# Altium PCB SFCRS232.PcbDoc
Units mm, origin at the board's own origin, x right, y up, seen from the top; angles counter-clockwise.
Board outline 149.66 x 75.74 mm, 2 copper layers (Top Layer, Bottom Layer); 13 components, 16 nets, 53 pads, 4 vias.
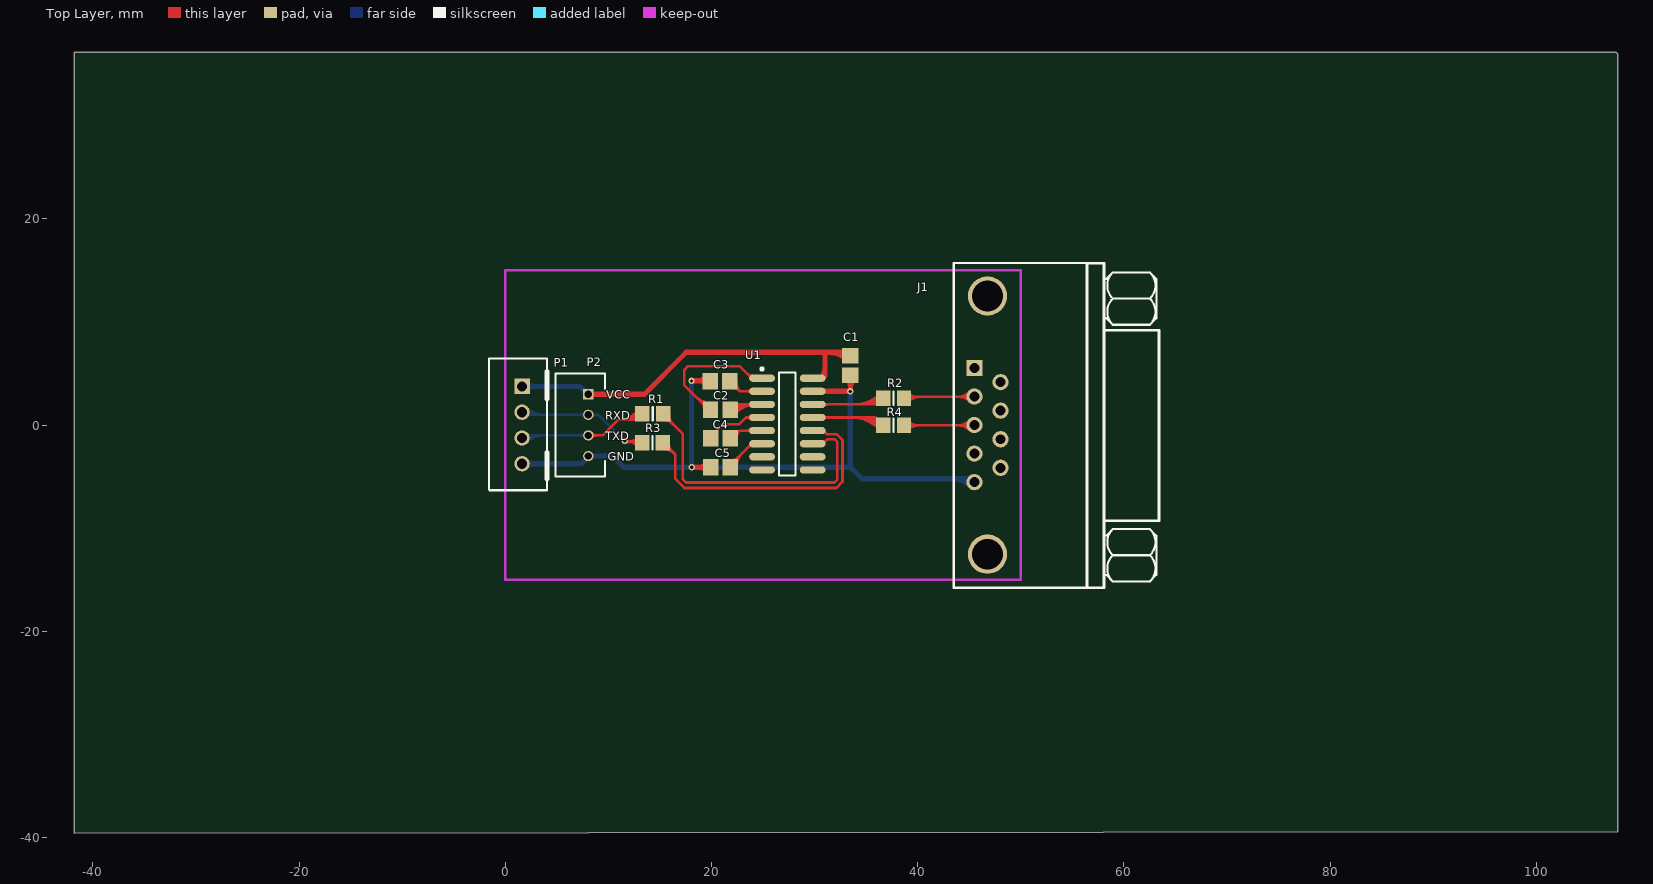
[diagram p0: Top Layer view]
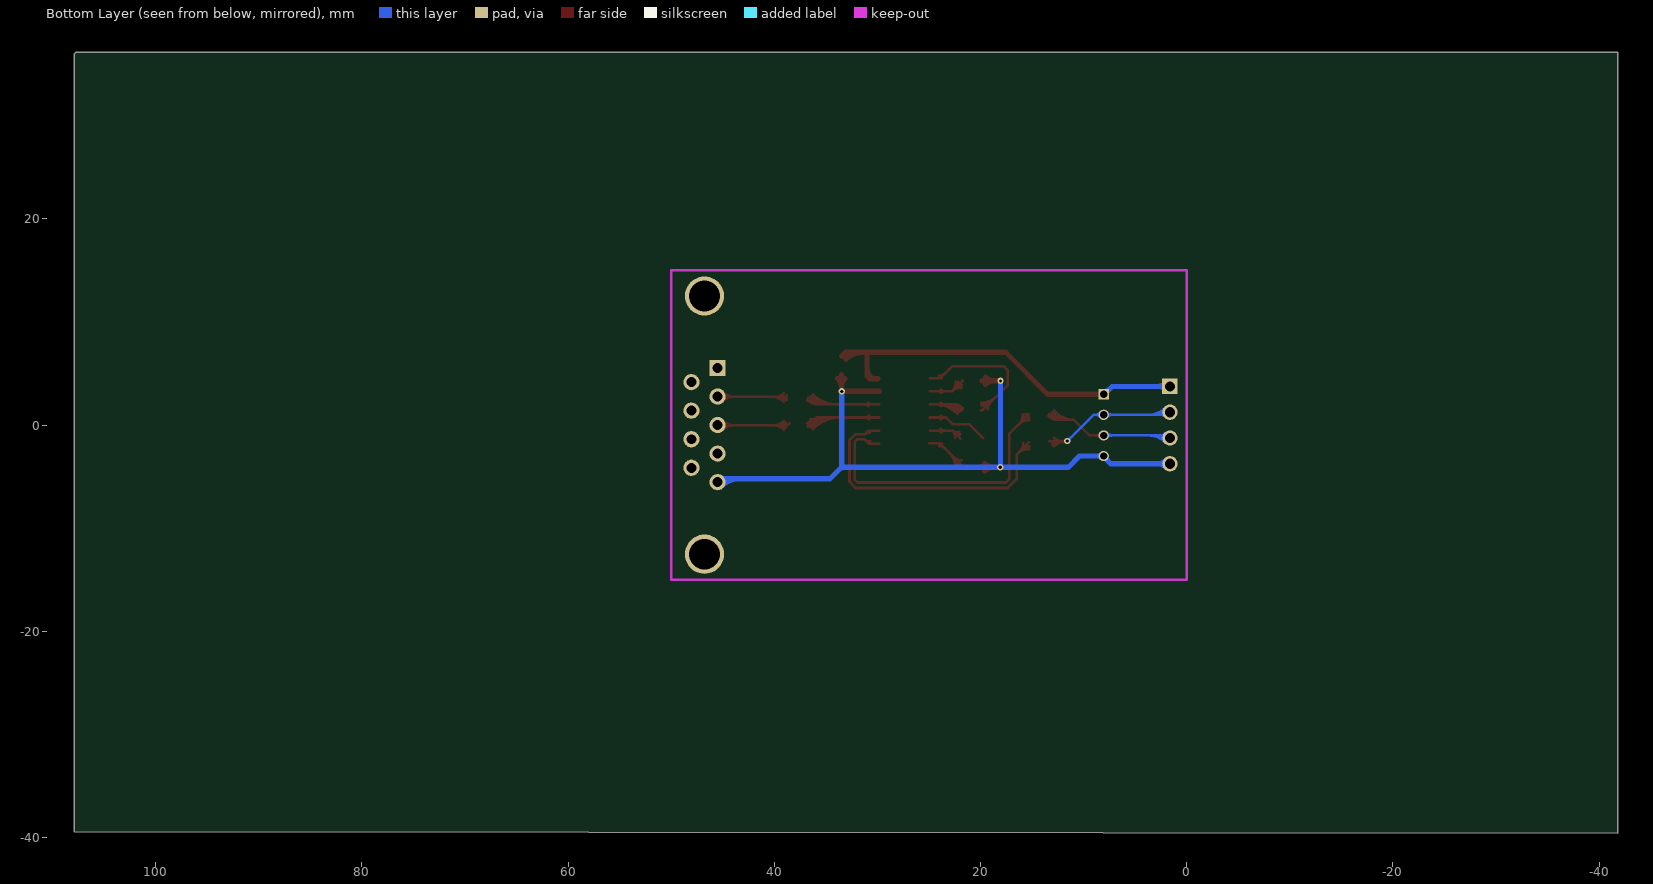
[diagram p1: Bottom Layer view, seen from below]

## Layer stack, top to bottom
Top Solder: solder mask 0.0102, Solder Resist, Dk 3.5
Top Layer: signal copper 0.0356
Dielectric1: dielectric 0.32, FR-4, Dk 4.8
Bottom Layer: signal copper 0.0356
Bottom Solder: solder mask 0.0102, Solder Resist, Dk 3.5

## Board outline
-41.785,-39.599 -41.785,36.144 107.719,36.144 107.77,36.093 107.871,35.992 107.871,-39.421

## Design rules (kind name [scope] priority, off if disabled: settings)
Clearance [All] p1: gap=0.245
HoleSize [All] p1: absolutevalues=TRUE maxlimit=5.08 minlimit=0.025 maxpercent=80.000 minpercent=20.000
PolygonConnect [All] p1: connectstyle=Relief reliefconductorwidth=0.254 reliefentries=4 polygonreliefangle="90 Angle" airgapwidth=0.254
RoutingVias [All] p1: holewidth=0.711 width=1.27 viastyle="Through Hole" minholewidth=0.711 minwidth=1.27 maxholewidth=0.711 maxwidth=1.27
SilkToSolderMaskClearance SilkscreenOverComponentPads [IsPad] p1: minsilkscreentomaskgap=0.254 clearancetoexposedcopper=TRUE
SolderMaskExpansion [All] p1: expansion=0.102
Width Width_PWR [InNet('VCC') or InNet('GND')] p1: maxlimit=0.508 minlimit=0.254 preferedwidth=0.508
Width [All] p2: maxlimit=0.254 minlimit=0.254 preferedwidth=0.254
27 further rules are at their usual default settings.

## Components (designator, comment, footprint, x,y, rotation, side; value= is the part's Value field where it differs from the comment)
C1 "0.1uF" CAPC2012M 33.452,5.791 r90 top
C2 "0.1uF" CAPC2012M 20.853,1.499 r180 top
C3 "0.1uF" CAPC2012M 20.828,4.267 r180 top
C4 "0.1uF" CAPC2012M 20.879,-1.295 r180 top
C5 "0.1uF" CAPC2012M 20.879,-4.089 r0 top
J1 "D Connector 9" DB9-M 46.765,0 r90 top
P1 "Header 4-2.5" HDR1X4-2.5 1.626,0 r270 top
P2 "Header 4-2.0" HDR1X4-2.0 8.052,0 r270 top
R1 "300R" RESC2012M 14.3,1.092 r0 top
R2 "300R" RESC2012M 37.668,2.616 r0 top
R3 "300R" RESC2012M 14.275,-1.702 r0 top
R4 "300R" RESC2012M 37.668,-0.025 r0 top
U1 "SP3232E" NSO16_M 27.356,0.102 r0 top

## Footprints (in the part's own frame and the unit in brackets; to place one, negate y for a bottom-side part, rotate by r counter-clockwise, add the part's x,y. Pads: shape width x height; smd on the part's side, far side on the other; paste and mask are expansions set on the pad)
CAPC2012M [mm] "Chip Capacitor, Body 2.0x1.3mm, IPC Low Density"
  rect 1.5x1.6 smd: 1(-0.95,0) 2(0.95,0)
  body extent -1.1,-0.72 1.1,0.72, height 1.1
DB9-M [mil] "DB9公座"
  rect 62x62 hole 38: 1(218,50)
  round 62 hole 38: 2(109,50) 3(0,50) 4(-109,50) 5(-218,50) 6(164,-50) 7(55,-50) 8(-54,-50) 9(-163,-50)
  round 150 hole 118.11: 10(493,0) 11(-493,0)
  silkscreen extent -622,-655 619,129, body extent -623,-375 617,125, height 394
HDR1X4-2.0 [mm] "Connector; Header; 4 Position, pitch 2mm"
  rect 1x1 hole 0.7: 1(-3,0)
  round 1 hole 0.7: 2(-1,0) 3(1,0) 4(3,0)
  silkscreen extent -5,-3.2 5,1.6
HDR1X4-2.5 [mm] "Connector; Header; 4 Position;Pitch 2.5mm"
  rect 1.5x1.5 hole 1: 1(-3.75,0)
  round 1.5 hole 1: 2(-1.25,0) 3(1.25,0) 4(3.75,0)
  silkscreen extent -6.45,-3.2 6.32,2.41
NSO16_M [mm] "SOIC, 16-Leads, Body 9.9x3.9mm, Pitch 1.27mm, IPC Low Density"
  oval 2.5x0.7 smd: 1(-2.45,4.445) 2(-2.45,3.175) 3(-2.45,1.905) 4(-2.45,0.635) 5(-2.45,-0.635) 6(-2.45,-1.905) 7(-2.45,-3.175) 8(-2.45,-4.445) 9(2.45,-4.445) 10(2.45,-3.175) 11(2.45,-1.905) 12(2.45,-0.635) 13(2.45,0.635) 14(2.45,1.905) 15(2.45,3.175) 16(2.45,4.445)
  silkscreen extent -2.57,-5 0.8,5.47, body extent -2,-5 2,5, height 1.75
RESC2012M [mm] "Chip Resistor, Body 2.0x1.3mm, IPC Low Density"
  rect 1.4x1.5 smd: 1(-1,0) 2(1,0)
  silkscreen extent 0,-0.65 0,0.65, body extent -1.07,-0.7 1.07,0.7, height 0.65

## Part data
C1 C2 C3 C4 C5: library part Cap, "Capacitor"
J1: "串口"
P1 P2: library part "Header 4", "Header, 4-Pin"
R1 R2 R3 R4: library part Res1, "Resistor"
U1: "+3.0V+5V Powered, Multi-Channel RS-232 Driver/Receiver"

## Via types
v1: diameter 0.6, hole 0.3, Top Layer to Bottom Layer, 4 vias

## Nets (pads, with @x,y where several pads share a name; then routed paths per layer and width w, separated by ;. In a path a pad name is that pad's centre, name@x,y a point inside that pad or via, vN(x,y) a via of type N, cw(c..) or ccw(c..) an arc to the next point about the centre after c; other vN are vias at no path point)
GND: C1.1 C3.2 C5.1 J1.5 P1.4 P2.4 U1.15 | length 81.4
  Top Layer w0.508: v1(18.059,4.293) C3.2@19.837,4.293 ; v1(18.085,-4.089) C5.1@20.066,-4.089 ; 18.621,4.293 ccw(c18.621,5.574) C3.2@19.527,4.668 ; 18.74,4.293 cw(c18.74,3.179) C3.2@19.527,3.966 ; C5.1@19.578,-4.44 ccw(c18.731,-5.287) 18.731,-4.089 ccw(c18.731,-2.892) C5.1@19.578,-3.739 ; U1.15 v1(33.452,3.277) 33.477,3.277 C1.1@33.477,4.902 ; C1.1@33.151,4.49 cw(c32.364,3.703) 33.477,3.703 ; 33.477,3.584 cw(c34.759,3.584) C1.1@33.853,4.49
  Bottom Layer w0.508: P1.4 7.375,-3.75 P2.4@8.077,-3.048 ; P1.4@1.976,-4.101 cw(c2.823,-4.947) 2.823,-3.75 cw(c2.823,-2.553) P1.4@1.976,-3.399 ; 7.58,-3.545 ccw(c7.035,-3) P2.4@7.806,-3 ; P2.4@8.026,-2.997 10.389,-2.997 11.481,-4.089 v1@18.059,-4.089 ; P2.4@8.226,-3.174 cw(c8.652,-3.601) 8.652,-2.997 ; P2.4@8.226,-2.826 ccw(c8.639,-2.413) 8.639,-2.997 ; v1(18.059,4.293) v1@18.059,-4.089 ; 33.452,-4.14 33.528,-4.14 34.595,-5.207 J1.5@45.034,-5.207 ; v1(33.452,3.277) 33.452,-4.115 ; 33.477,-4.14 33.452,-4.115 ; 43.41,-5.207 cw(c43.41,-7.622) J1.5@45.118,-5.914 ; 44.636,-5.207 cw(c44.636,-6.396) J1.5@45.477,-5.555 ; v1@18.059,-4.089 v1(18.085,-4.089) 33.426,-4.089 33.452,-4.115
MCU_RXD1: R3.2 U1.12 | length 31.7
  Top Layer w0.254: R3.2@15.275,-2.325 cw(c15.275,-3.99) 16.452,-2.813 ; R3.2@15.275,-2.071 cw(c15.275,-3.123) 16.019,-2.379 ; R3.2@15.291,-1.651 16.485,-2.845 16.485,-5.207 17.374,-6.096 32.1,-6.096 32.706,-5.49 32.706,-1.444 32.134,-0.873 31.2,-0.873 ; R3.2@15.848,-1.752 ccw(c16.949,-1.752) 16.17,-2.531 ; U1.12 30.861,-0.533 31.2,-0.873 ; U1.12@30.759,-0.75 cw(c30.871,-1.202) 31.2,-0.873
MCU_RXDA: P1.2 P2.2 R3.1 | length 25.4
  Top Layer w0.254: v1(11.582,-1.549) R3.1@13.335,-1.549 ; v1@11.644,-1.549 cw(c11.644,-3.282) R3.1@12.87,-2.057 ; v1@11.669,-1.699 cw(c11.905,-2.108) 12.027,-1.652 ; v1@11.705,-1.672 cw(c12,-1.967) 12,-1.549 cw(c12,-1.132) v1@11.705,-1.427 ; v1@11.732,-1.463 ccw(c12.047,-1.281) 11.953,-1.632 ; 12.139,-1.549 ccw(c12.139,-0.516) R3.1@12.87,-1.247 ; 12.257,-1.549 cw(c12.257,-2.669) R3.1@13.049,-1.877
  Bottom Layer w0.254: P1.2@1.651,1.27 1.921,1 9.033,1 v1@11.633,-1.6 ; P1.2@1.707,1.331 ccw(c2.507,2.131) 2.507,1 ; P1.2@1.887,1.511 ccw(c3.12,2.744) 3.12,1 ; P1.2@2.066,0.809 cw(c2.526,0.349) 2.526,1 ; P1.2@2.066,1.691 ccw(c3.733,3.358) 3.733,1 ; P2.2@7.788,0.736 ccw(c7.151,0.099) 7.151,1 ccw(c7.151,1.9) P2.2@7.788,1.264 ; P2.2@8.316,0.736 cw(c8.952,0.099) 8.952,1 cw(c8.952,1.9) P2.2@8.316,1.264 ; v1@11.409,-1.549 ccw(c10.992,-1.549) 11.287,-1.254 ccw(c11.582,-0.959) v1@11.582,-1.376
MCU_TXD1: R1.2 U1.11 | length 32.7
  Top Layer w0.254: R1.2@15.3,0.469 cw(c15.3,-0.951) 16.304,0.053 ; R1.2@15.3,0.723 cw(c15.3,-0.084) R1.2@15.871,0.487 ; R1.2@15.367,1.118 15.367,0.991 17.196,-0.838 17.196,-5.213 17.546,-5.563 31.928,-5.563 32.207,-5.283 32.207,-1.651 31.928,-1.372 31.267,-1.372 ; R1.2@15.619,1.042 ccw(c16.353,1.042) R1.2@15.834,0.524 ; R1.2@15.873,1.042 ccw(c17.22,1.042) 16.268,0.09 ; U1.11 30.836,-1.803 31.267,-1.372 ; U1.11@30.719,-1.581 ccw(c30.76,-0.864) 31.267,-1.372
MCU_TXDA: P1.3 P2.3 R1.1 | length 26.5
  Top Layer w0.254: P2.3 9.414,-1 10.922,0.508 ; P2.3@8.316,-1.264 cw(c8.952,-1.901) 8.952,-1 cw(c8.952,-0.1) P2.3@8.316,-0.736 ; 11.468,0.508 ccw(c11.468,2.584) R1.1@13.056,1.248 ; 12.013,0.508 ccw(c12.013,2.125) R1.1@13.25,1.084 ; 12.559,0.508 ccw(c12.559,1.666) R1.1@13.445,0.921 ; R1.1@12.862,1.411 cw(c10.922,3.042) 10.922,0.508 ; R1.1@13.335,1.092 12.751,0.508 10.922,0.508
  Bottom Layer w0.254: P1.3@1.676,-1.27 1.946,-1 P2.3 ; P1.3@1.707,-1.331 cw(c2.507,-2.131) 2.507,-1 ; P1.3@1.887,-1.511 cw(c3.12,-2.744) 3.12,-1 ; P1.3@2.066,-1.691 cw(c3.733,-3.358) 3.733,-1 ; P1.3@2.066,-0.809 ccw(c2.526,-0.35) 2.526,-1 ; P2.3@7.788,-1.264 ccw(c7.151,-1.901) 7.151,-1 ccw(c7.151,-0.1) P2.3@7.788,-0.736
NetC2_1: C2.1 U1.3 | length 11
  Top Layer w0.254: C2.1@21.705,1.647 cw(c22.574,0.778) 22.574,2.007 ; C2.1@21.768,1.422 22.352,2.007 U1.3 ; C2.1@21.885,1.467 cw(c23.187,0.165) 23.187,2.007 ; C2.1@22.064,1.288 cw(c23.8,-0.448) U1.3@23.8,2.007 ; C2.1@22.244,1.108 cw(c24.413,-1.061) U1.3@24.413,2.007 ; U1.3@23.848,1.849 ccw(c23.467,1.468) 23.467,2.007 ccw(c23.467,2.545) U1.3@23.848,2.164
NetC2_2: C2.2 U1.1 | length 17.6
  Top Layer w0.254: 18.468,2.766 ccw(c19.903,4.201) C2.2@19.903,2.172 ; 18.902,2.332 ccw(c19.903,3.334) C2.2@19.903,1.918 ; 18.994,2.241 cw(c18.302,1.549) C2.2@19.28,1.549 ; C2.2@19.99,1.448 19.787,1.448 17.374,3.861 17.374,5.359 17.729,5.715 22.733,5.715 23.901,4.547 U1.1 ; 23.447,5.001 ccw(c24.006,5.56) U1.1@24.006,4.77 ; 23.699,4.749 cw(c23.496,4.547) U1.1@23.783,4.547
NetC3_1: C3.1 U1.2 | length 7.7
  Top Layer w0.254: C3.1@21.717,4.343 22.784,3.277 ; C3.1@21.822,3.851 cw(c21.908,3.139) C3.1@22.414,3.646 ; C3.1@21.852,3.599 cw(c21.987,2.48) 22.784,3.277 ; C3.1@22.147,4.214 ccw(c22.858,4.208) C3.1@22.355,3.705 ; C3.1@22.401,4.212 ccw(c23.708,4.201) 22.784,3.277 ; U1.2@23.848,3.119 ccw(c23.467,2.738) 23.467,3.277 ccw(c23.467,3.815) U1.2@23.848,3.434 ; U1.2 22.784,3.277
NetC4_1: C4.1 U1.5 | length 6.2
  Top Layer w0.254: C4.1@21.946,-1.321 22.733,-0.533 ; C4.1@21.968,-0.904 ccw(c22.14,-0.482) C4.1@22.463,-0.804 ; C4.1@22.064,-0.668 ccw(c22.297,-0.097) 22.733,-0.533 ; C4.1@22.452,-1.233 cw(c23.413,-1.213) 22.733,-0.533 ; U1.5@23.848,-0.691 ccw(c23.467,-1.072) 23.467,-0.533 ccw(c23.467,0.005) U1.5@23.848,-0.376 ; U1.5 22.733,-0.533
NetC4_2: C4.2 U1.4 | length 6.8
  Top Layer w0.254: C4.2@19.761,-1.245 21.082,0.076 22.682,0.076 23.343,0.737 U1.4 ; U1.4@23.848,0.579 ccw(c23.467,0.198) 23.467,0.737 ccw(c23.467,1.275) U1.4@23.848,0.894
NetC5_2: C5.2 U1.6 | length 8.4
  Top Layer w0.254: C5.2 21.829,-3.876 23.927,-1.778 U1.6@24.943,-1.778 ; C5.2@21.829,-3.416 ccw(c21.829,-2.307) 22.613,-3.091 ; C5.2@22.198,-4.039 cw(c23.483,-4.039) 22.574,-3.131 ; C5.2@22.452,-4.039 cw(c24.35,-4.039) 23.008,-2.697 ; 23.447,-2.258 cw(c24.006,-2.817) U1.6@24.006,-2.026 ; 23.699,-2.006 ccw(c23.496,-1.803) U1.6@23.783,-1.803
NetJ1_2: J1.2 R2.2 | length 14.3
  Top Layer w0.254: R2.2@38.786,2.438 38.786,2.87 38.913,2.743 45.542,2.743 J1.2@45.568,2.718 ; R2.2@38.894,2.441 cw(c39.624,1.71) 39.624,2.743 ; R2.2@39.073,2.261 cw(c40.237,1.097) 40.237,2.743 ; R2.2@39.073,3.071 ccw(c39.866,3.864) 39.866,2.743 ; 43.839,2.743 ccw(c43.839,4.424) J1.2@45.028,3.236 ; 43.962,2.743 cw(c43.962,1.235) J1.2@45.028,2.302 ; 44.452,2.743 ccw(c44.452,3.811) J1.2@45.207,3.056 ; 44.575,2.743 cw(c44.575,1.849) J1.2@45.207,2.481
NetJ1_3: J1.3 R4.2 | length 14.5
  Top Layer w0.254: R4.2@38.532,0.152 38.71,-0.025 J1.3@45.517,-0.025 ; R4.2@38.894,-0.251 cw(c39.438,-0.796) 39.438,-0.025 cw(c39.438,0.745) R4.2@38.894,0.2 ; R4.2@39.073,-0.431 cw(c40.052,-1.409) 40.052,-0.025 cw(c40.052,1.358) R4.2@39.073,0.38 ; 43.839,-0.025 ccw(c43.839,1.656) J1.3@45.028,0.467 ; 43.962,-0.025 cw(c43.962,-1.533) J1.3@45.028,-0.467 ; 44.452,-0.025 ccw(c44.452,1.042) J1.3@45.207,0.287 ; 44.575,-0.025 cw(c44.575,-0.92) J1.3@45.207,-0.287
RS232_RXD1: R4.1 U1.13 | length 18.7
  Top Layer w0.254: U1.13 35.865,0.737 ; U1.13@30.863,0.579 cw(c31.244,0.198) 31.244,0.737 cw(c31.244,1.275) U1.13@30.863,0.894 ; 33.566,0.737 cw(c33.566,-3.078) R4.1@36.263,-0.381 ; 34.179,0.737 cw(c34.179,-2.464) R4.1@36.443,-0.201 ; 34.792,0.737 cw(c34.792,-1.851) R4.1@36.622,-0.021 ; 35.406,0.737 cw(c35.406,-1.238) R4.1@36.802,0.158 ; R4.1@36.098,0.082 ccw(c35.292,0.164) 35.865,0.737 ; R4.1@36.505,0.574 cw(c36.322,1.193) 35.865,0.737 ; R4.1@36.754,-0.152 35.865,0.737
RS232_TXD1: R2.1 U1.14 | length 15.4
  Top Layer w0.254: U1.14 36.017,2.007 R2.1@36.678,2.667 ; U1.14@30.863,1.849 cw(c31.244,1.468) 31.244,2.007 cw(c31.244,2.545) U1.14@30.863,2.164 ; 33.934,2.007 ccw(c33.934,5.301) R2.1@36.263,2.971 ; 34.547,2.007 ccw(c34.547,4.687) R2.1@36.443,2.792 ; 35.16,2.007 ccw(c35.16,4.074) R2.1@36.622,2.612 ; 35.773,2.007 ccw(c35.773,3.461) R2.1@36.802,2.433
VCC: C1.2 P1.1 P2.1 U1.16 | length 48.6
  Top Layer w0.508: P2.1@8.052,2.997 13.487,2.997 17.551,7.061 C1.2@33.02,7.061 ; P2.1@8.226,2.826 cw(c8.639,2.413) 8.639,2.997 ; P2.1@8.226,3.174 ccw(c8.652,3.601) 8.652,2.997 ; U1.16@29.947,4.496 30.734,4.496 30.994,4.756 ; U1.16@30.638,4.614 ccw(c29.777,5.475) 30.994,5.475 ; U1.16@30.709,4.643 ccw(c30.72,5.031) 30.994,4.756 ; 31.432,7.061 cw(c31.432,4.771) 33.051,6.39 ccw(c31.493,4.833) 31.493,7.036 ; C1.2@32.658,7.061 cw(c32.658,5.998) C1.2@33.41,6.75 ; C1.2@33.477,6.706 33.426,6.655 33.426,6.731 33.122,7.036 30.994,7.036 30.994,4.756
  Bottom Layer w0.508: P1.1 7.223,3.75 P2.1@8.052,2.921 ; P1.1@1.976,3.399 cw(c2.823,2.553) 2.823,3.75 cw(c2.823,4.947) P1.1@1.976,4.101 ; 7.497,3.476 ccw(c8.052,4.031) P2.1@8.052,3.246
pads on no net: J1.1 J1.4 J1.6 J1.7 J1.8 J1.9 J1.10 J1.11 U1.7 U1.8 U1.9 U1.10

## Keep-outs
Keep-Out Layer:
  lines w0.254: 0,-15 0,15 50,15 50,-15 0,-15

## Silkscreen, mask and mechanical layers (free items; w line width, h text height)
Top Overlay:
  text "VCC" at 9.804,2.54 h0.8
  text "RXD" at 9.677,0.508 h0.8
  text "TXD" at 9.677,-1.473 h0.8
  text "GND" at 9.957,-3.454 h0.8

## Dimensions
0,-15 to 50,-15 on Mechanical 15
0,-15 to 0,15 on Mechanical 15